# EAGLE board Circuit board stage 1 (PCB layout) v19 (EAGLE 9.7.0)
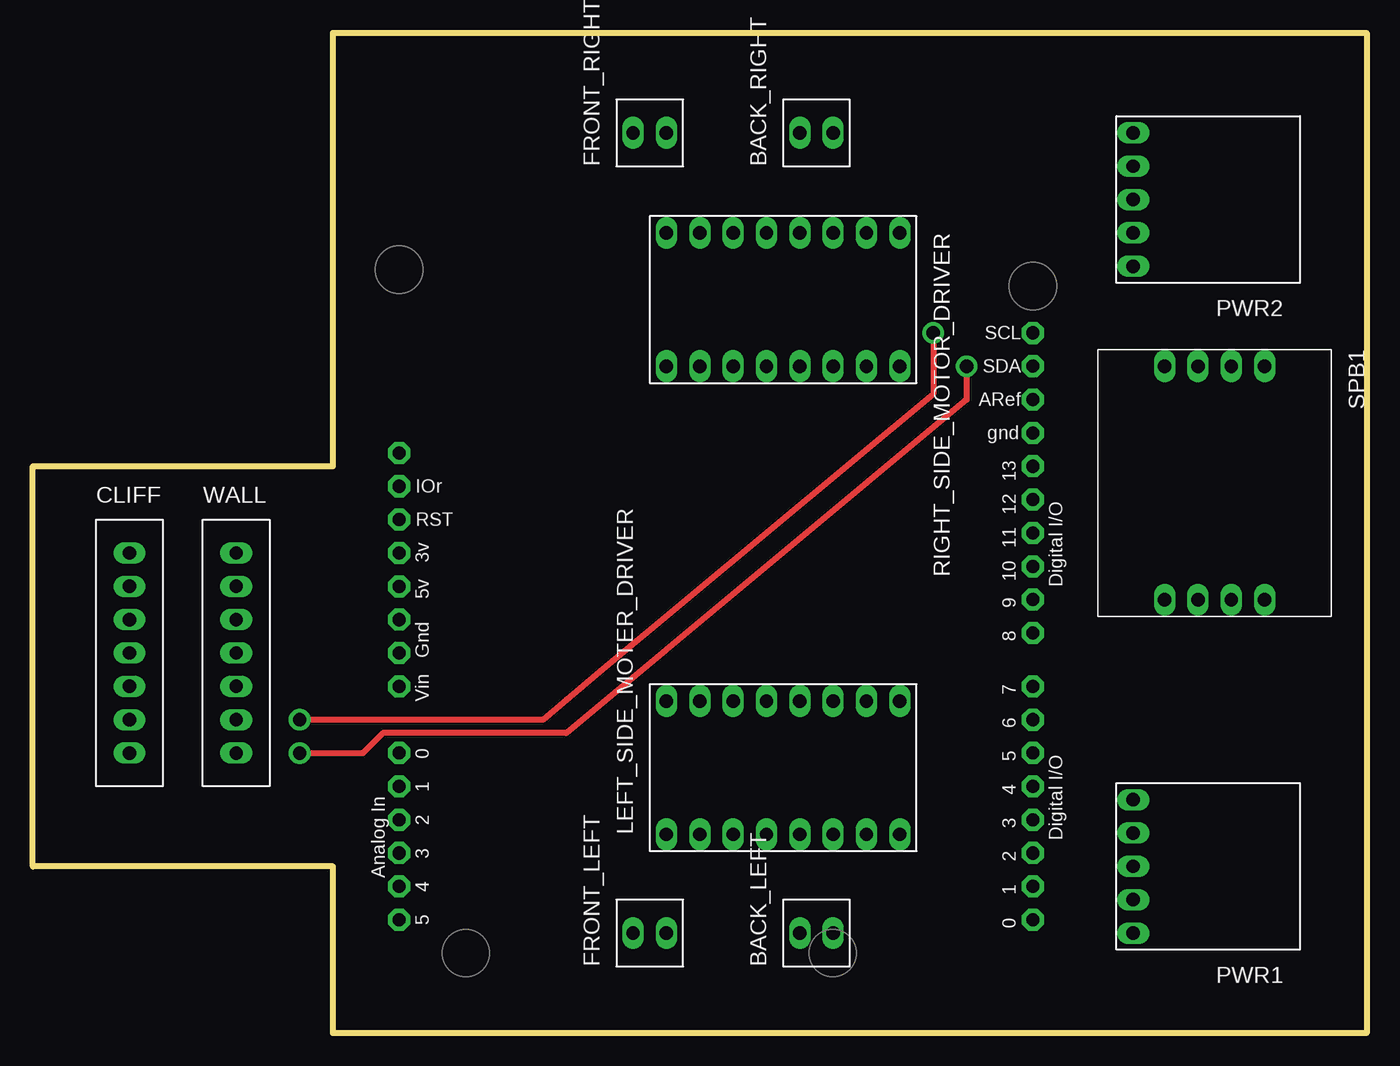
[diagram p0: board, top side]
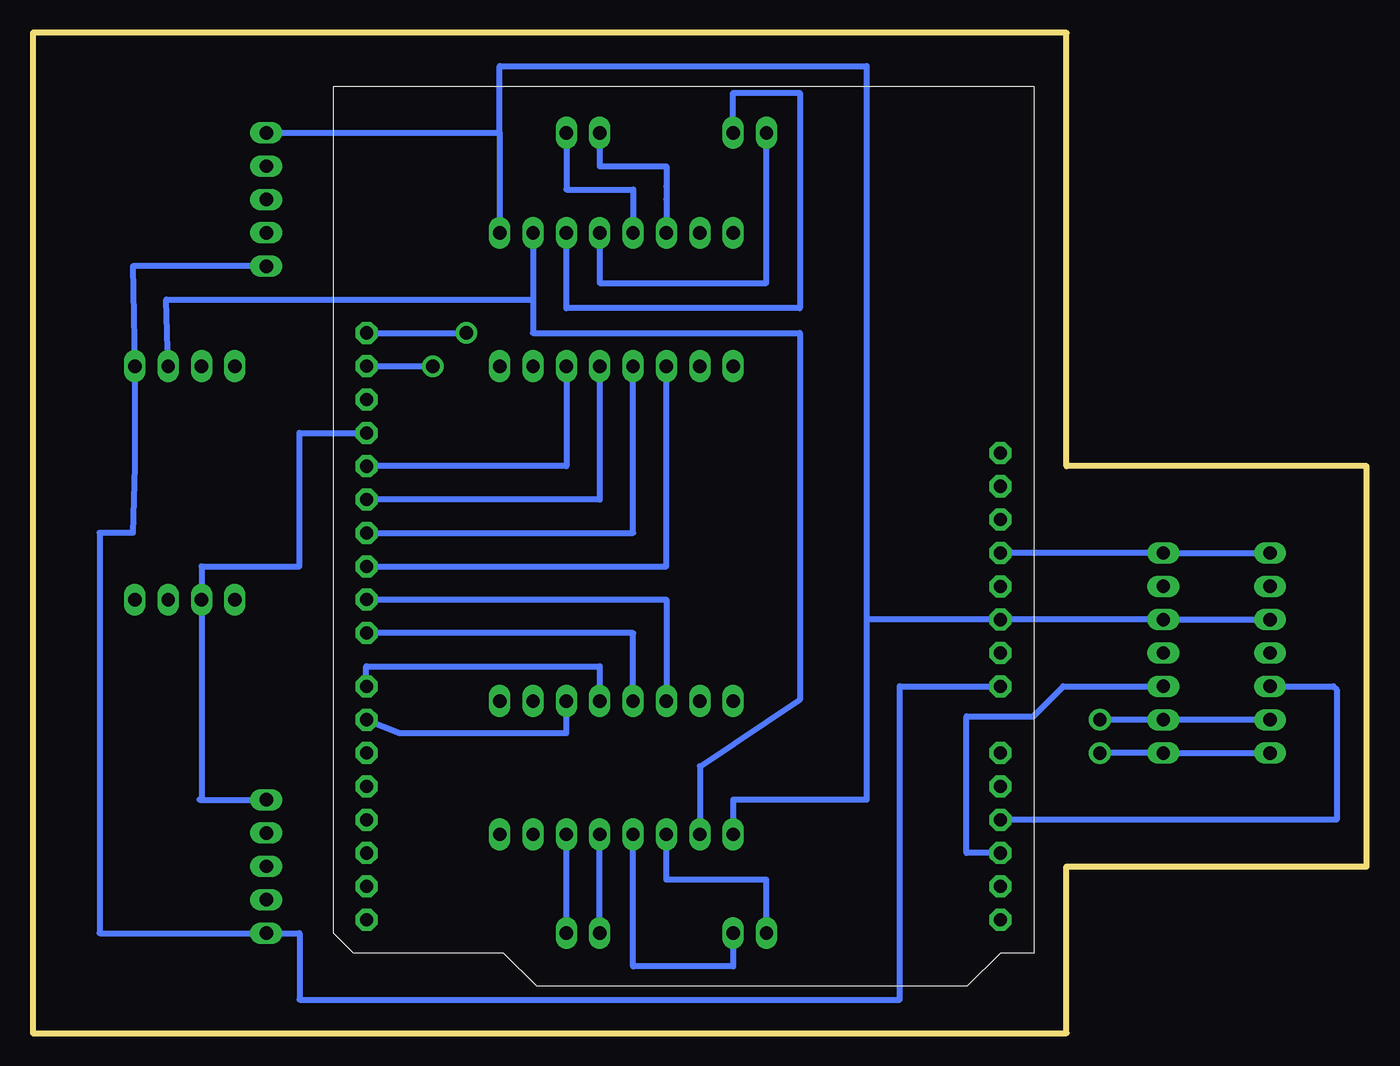
[diagram p1: board, bottom side, seen from below]

Size 101.6 x 76.2 mm. Coordinates in mm from the lower left corner, seen from the top.
Outline: 101.6,0 22.86,0 22.86,12.7 0,12.7 0,43.18 22.86,43.18 22.86,76.2 101.6,76.2 101.6,0
Copper layers (1*16): Top 0.035mm / dielectric 1.5mm / Bottom 0.035mm
Design rules "OthermillDRC_1_32_v2": minimum track width 8mil, minimum drill 0.8mm, track to track 0.794003125mm, track to pad 0.794003125mm, pad to pad 0.794003125mm, via to via 0.794003125mm, smd to smd 0mil, copper to edge 0mil, drill to drill 1mil, minimum pad ring 10mil, minimum via ring 10mil, stop-mask expansion 1mil, vias tented up to drill 30mil, thermal gap 10mil

## Footprints (pad centres in the part's own frame; a part is rotated, then mirrored left to right if it is on the bottom)
MOTOR_OUTPUT_PINS = drill 1.016 pad 1.651 long: 1 0,1.27; 2 0,-1.27
DISTANCE_SENS_OUT = drill 1.016 pad 1.651 long: 1 0,7.62; 2 0,5.08; 3 0,2.54; 4 0,0; 5 0,-2.54; 6 0,-5.08; 7 0,-7.62
MOTOR_DRIVER = drill 1.016 pad 1.651 long: 1 -5.08,8.89; 2 -5.08,6.35; 3 -5.08,3.81; 4 -5.08,1.27; 5 -5.08,-1.27; 6 -5.08,-3.81; 7 -5.08,-6.35; 8 -5.08,-8.89; 9 5.08,8.89; 10 5.08,6.35; 11 5.08,3.81; 12 5.08,1.27; 13 5.08,-1.27; 14 5.08,-3.81; 15 5.08,-6.35; 16 5.08,-8.89
MICRO-USB_ADAPTER = drill 1.016 pad 1.651 long: 1 6.35,5.08; 2 6.35,2.54; 3 6.35,0; 4 6.35,-2.54; 5 6.35,-5.08
ADAFRUIT-SOFT-POWER-BUTTON_FOOTPRINT = drill 1.016 pad 1.651 long: 1 8.89,3.81; 2\ 8.89,1.27; 3 8.89,-1.27; 4 8.89,-3.81; 5 -8.89,3.81; 6 -8.89,1.27; 7 -8.89,-1.27; 8 -8.89,-3.81
ARDUINOR3-BPLACE = drill 1 pad 1.676 octagon: 3V 35.56,2.54; 5V 38.1,2.54; A0 50.8,2.54; A1 53.34,2.54; A2 55.88,2.54; A3 58.42,2.54; A4 60.96,2.54; A5 63.5,2.54; AREF 23.876,50.8; D0 63.5,50.8; D1 60.96,50.8; D2 58.42,50.8; D3 55.88,50.8; D4 53.34,50.8; D5 50.8,50.8; D6 48.26,50.8; D7 45.72,50.8; D8 41.656,50.8; D9 39.116,50.8; D10 36.576,50.8; D11 34.036,50.8; D12 31.496,50.8; D13 28.956,50.8; GND 26.416,50.8; GND1 43.18,2.54; GND2 40.64,2.54; IOREF 30.48,2.54; RESERVED 27.94,2.54; RESET 33.02,2.54; SCL 18.796,50.8; SDA 21.336,50.8; VIN 45.72,2.54

## Placement (x,y rotation side)
BACK_LEFT  MOTOR_OUTPUT_PINS  [MOTOR_OUTPUT_PINS]  59.69,7.62 90 top
BACK_RIGHT  MOTOR_OUTPUT_PINS  [MOTOR_OUTPUT_PINS]  59.69,68.58 90 top
CLIFF  DIST_SENS_OUTPUTPINS  [DISTANCE_SENS_OUT]  7.37,28.96 0 top
FRONT_LEFT  MOTOR_OUTPUT_PINS  [MOTOR_OUTPUT_PINS]  46.99,7.62 90 top
FRONT_RIGHT  MOTOR_OUTPUT_PINS  [MOTOR_OUTPUT_PINS]  46.99,68.58 90 top
LEFT_SIDE_MOTER_DRIVER  MOTOR_DRIVER  [MOTOR_DRIVER]  57.15,20.22 90 top
PWR1  MICRO-USB_ADAPTER  [MICRO-USB_ADAPTER]  90.17,12.7 180 top
PWR2  MICRO-USB_ADAPTER  [MICRO-USB_ADAPTER]  90.17,63.5 180 top
RIGHT_SIDE_MOTOR_DRIVER  MOTOR_DRIVER  [MOTOR_DRIVER]  57.15,55.88 270 top
SPB1  SOFT-POWER_BUTTON  [ADAFRUIT-SOFT-POWER-BUTTON_FOOTPRINT]  90.02,41.91 270 top
U2  ARDUINOR3-BPLACE  [ARDUINOR3-BPLACE]  25.36,72.14 270 top
WALL  DIST_SENS_OUTPUTPINS  [DISTANCE_SENS_OUT]  15.49,28.96 0 top

## Library data of the parts
BACK_LEFT BACK_RIGHT FRONT_LEFT FRONT_RIGHT = motor_output_pins
CLIFF WALL = dist_sens_output_pins
LEFT_SIDE_MOTER_DRIVER RIGHT_SIDE_MOTOR_DRIVER = MOTOR_DRIVER
PWR1 PWR2 = mico-usb adapter
SPB1 = Soft-power-button library
U2 = adafruit

## Nets
5V: U2.5V
+3.3V: CLIFF.1 U2.3V WALL.1
+5V: PWR1.1 PWR2.1 SPB1.5 U2.VIN
G2: SPB1.7
GND: PWR1.5 SPB1.3 U2.GND
GND1: U2.GND1
N$1: FRONT_RIGHT.2 RIGHT_SIDE_MOTOR_DRIVER.3
N$2: FRONT_RIGHT.1 RIGHT_SIDE_MOTOR_DRIVER.4
N$3: BACK_RIGHT.2 RIGHT_SIDE_MOTOR_DRIVER.5
N$4: BACK_RIGHT.1 RIGHT_SIDE_MOTOR_DRIVER.6
N$5: FRONT_LEFT.2 LEFT_SIDE_MOTER_DRIVER.4
N$6: FRONT_LEFT.1 LEFT_SIDE_MOTER_DRIVER.3
N$7: BACK_LEFT.2 LEFT_SIDE_MOTER_DRIVER.6
N$8: BACK_LEFT.1 LEFT_SIDE_MOTER_DRIVER.5
N$9: RIGHT_SIDE_MOTOR_DRIVER.11 U2.D13
N$10: RIGHT_SIDE_MOTOR_DRIVER.12 U2.D12
N$11: RIGHT_SIDE_MOTOR_DRIVER.13 U2.D11
N$12: RIGHT_SIDE_MOTOR_DRIVER.14 U2.D10
N$13: LEFT_SIDE_MOTER_DRIVER.11 U2.D9
N$14: LEFT_SIDE_MOTER_DRIVER.12 U2.D8
N$15: LEFT_SIDE_MOTER_DRIVER.13 U2.D7
N$16: LEFT_SIDE_MOTER_DRIVER.14 U2.D6
N$17: CLIFF.6 U2.SCL WALL.6
N$18: CLIFF.7 U2.SDA WALL.7
N$19: LEFT_SIDE_MOTER_DRIVER.2 RIGHT_SIDE_MOTOR_DRIVER.2 SPB1.6
N$20: CLIFF.5 U2.A2
N$21: U2.A3 WALL.5
S$1: CLIFF.3 LEFT_SIDE_MOTER_DRIVER.1 U2.GND2 WALL.3
S$2: PWR2.5 RIGHT_SIDE_MOTOR_DRIVER.1

## Tracks (layer width: path | path; a pad name or v marks a point on that pad's centre or on a via)
+3.3V
  Bottom 0.457: U2.3V WALL.1 CLIFF.1
+5V
  Bottom 0.457: U2.VIN 35.56,26.42 35.56,2.54 81.28,2.54 81.28,7.62 PWR1.1 96.52,7.62 96.52,38.1 93.98,38.1 93.83,43.18 SPB1.5 93.98,58.42 PWR2.1
GND
  Bottom 0.457: U2.GND 81.28,45.72 81.28,35.56 88.75,35.56 SPB1.3 88.75,17.93 88.9,17.78 PWR1.5
N$1
  Bottom 0.457: FRONT_RIGHT.2 48.26,71.63 43.18,71.63 43.18,55.22 60.96,55.22 RIGHT_SIDE_MOTOR_DRIVER.3
N$2
  Bottom 0.457: RIGHT_SIDE_MOTOR_DRIVER.4 58.42,57.15 45.72,57.15 FRONT_RIGHT.1
N$3
  Bottom 0.457: BACK_RIGHT.2 60.96,64.26 55.88,64.26 RIGHT_SIDE_MOTOR_DRIVER.5
N$4
  Bottom 0.457: RIGHT_SIDE_MOTOR_DRIVER.6 53.34,63.5 53.34,64.52 53.34,66.04 58.42,66.04 BACK_RIGHT.1
N$5
  Bottom 0.457: FRONT_LEFT.2 48.26,5.08 55.88,5.08 LEFT_SIDE_MOTER_DRIVER.4
N$6
  Bottom 0.457: FRONT_LEFT.1 45.72,11.68 53.34,11.68 LEFT_SIDE_MOTER_DRIVER.3
N$7
  Bottom 0.457: BACK_LEFT.2 LEFT_SIDE_MOTER_DRIVER.6
N$8
  Bottom 0.457: BACK_LEFT.1 LEFT_SIDE_MOTER_DRIVER.5
N$9
  Bottom 0.457: RIGHT_SIDE_MOTOR_DRIVER.11 60.96,43.18 U2.D13
N$10
  Bottom 0.457: U2.D12 58.42,40.64 RIGHT_SIDE_MOTOR_DRIVER.12
N$11
  Bottom 0.457: U2.D11 55.88,38.1 RIGHT_SIDE_MOTOR_DRIVER.13
N$12
  Bottom 0.457: U2.D10 53.34,35.56 RIGHT_SIDE_MOTOR_DRIVER.14
N$13
  Bottom 0.457: LEFT_SIDE_MOTER_DRIVER.11 53.34,33.02 U2.D9
N$14
  Bottom 0.457: LEFT_SIDE_MOTER_DRIVER.12 55.88,30.48 U2.D8
N$15
  Bottom 0.457: LEFT_SIDE_MOTER_DRIVER.13 58.42,27.94 76.2,27.94 76.2,26.42 U2.D7
N$16
  Bottom 0.457: LEFT_SIDE_MOTER_DRIVER.14 60.96,22.86 73.66,22.86 U2.D6
N$17  (via drill 1.02 pad 1.65)
  Top 0.457: v20.32,23.88 38.86,23.88 40.64,25.4 43.39,27.69 | v68.58,53.34 68.58,48.68 43.39,27.69 | 43.39,27.69
  Bottom 0.457: CLIFF.6 WALL.6 v20.32,23.88 | U2.SCL v68.58,53.34
N$18  (via drill 1.02 pad 1.65)
  Top 0.457: v20.32,21.34 25.15,21.34 26.67,22.86 40.64,22.86 71.12,48.26 v71.12,50.8
  Bottom 0.457: CLIFF.7 WALL.7 v20.32,21.34 | U2.SDA v71.12,50.8
N$19
  Bottom 0.457: RIGHT_SIDE_MOTOR_DRIVER.2 63.5,55.88 | 63.5,55.88 63.5,53.34 43.19,53.34 43.18,53.33 43.18,25.4 50.71,20.32 50.8,20.32 LEFT_SIDE_MOTER_DRIVER.2 | SPB1.6 91.44,55.88 63.5,55.88
N$20
  Bottom 0.457: CLIFF.5 2.54,26.42 2.29,26.16 2.29,16.26 U2.A2
N$21
  Bottom 0.457: WALL.5 23.11,26.42 25.4,24.13 30.48,24.13 30.48,13.72 U2.A3
S$1
  Bottom 0.457: CLIFF.3 WALL.3 U2.GND2 38.1,31.5 38.1,17.78 48.26,17.78 LEFT_SIDE_MOTER_DRIVER.1
S$2
  Bottom 0.457: PWR2.5 66.04,68.58 | 66.04,68.58 RIGHT_SIDE_MOTOR_DRIVER.1 | 66.04,68.58 66.04,73.66 38.1,73.66 38.1,33.02 38.1,30.48